# Altium PCB PCB1.PcbDoc (part 1 of 2)
Units mm, origin at the board's own origin, x right, y up, seen from the top; angles counter-clockwise.
Board outline 66.9 x 83.08 mm, 2 copper layers (Top Layer, Bottom Layer); 80 components, 71 nets, 363 pads, 140 vias.
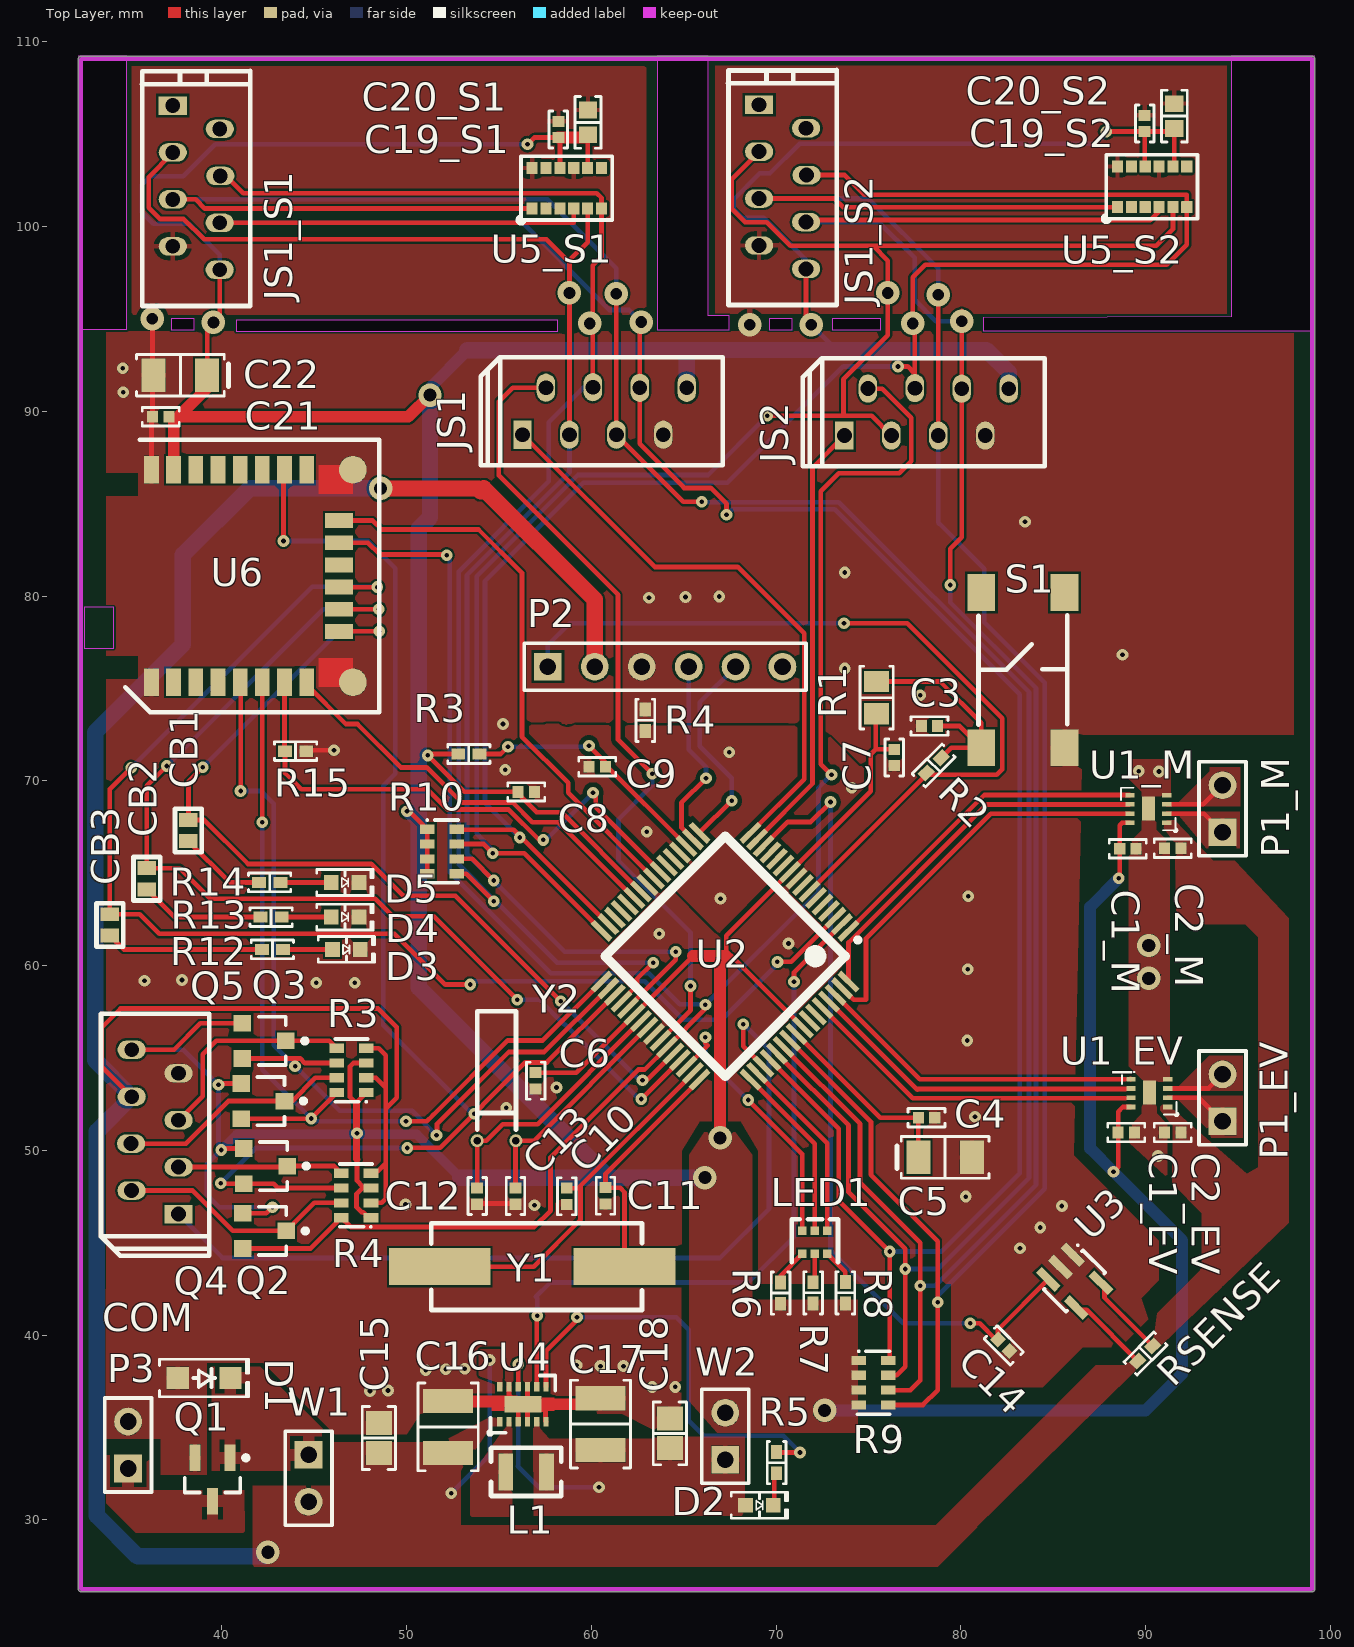
[diagram p0: Top Layer view]
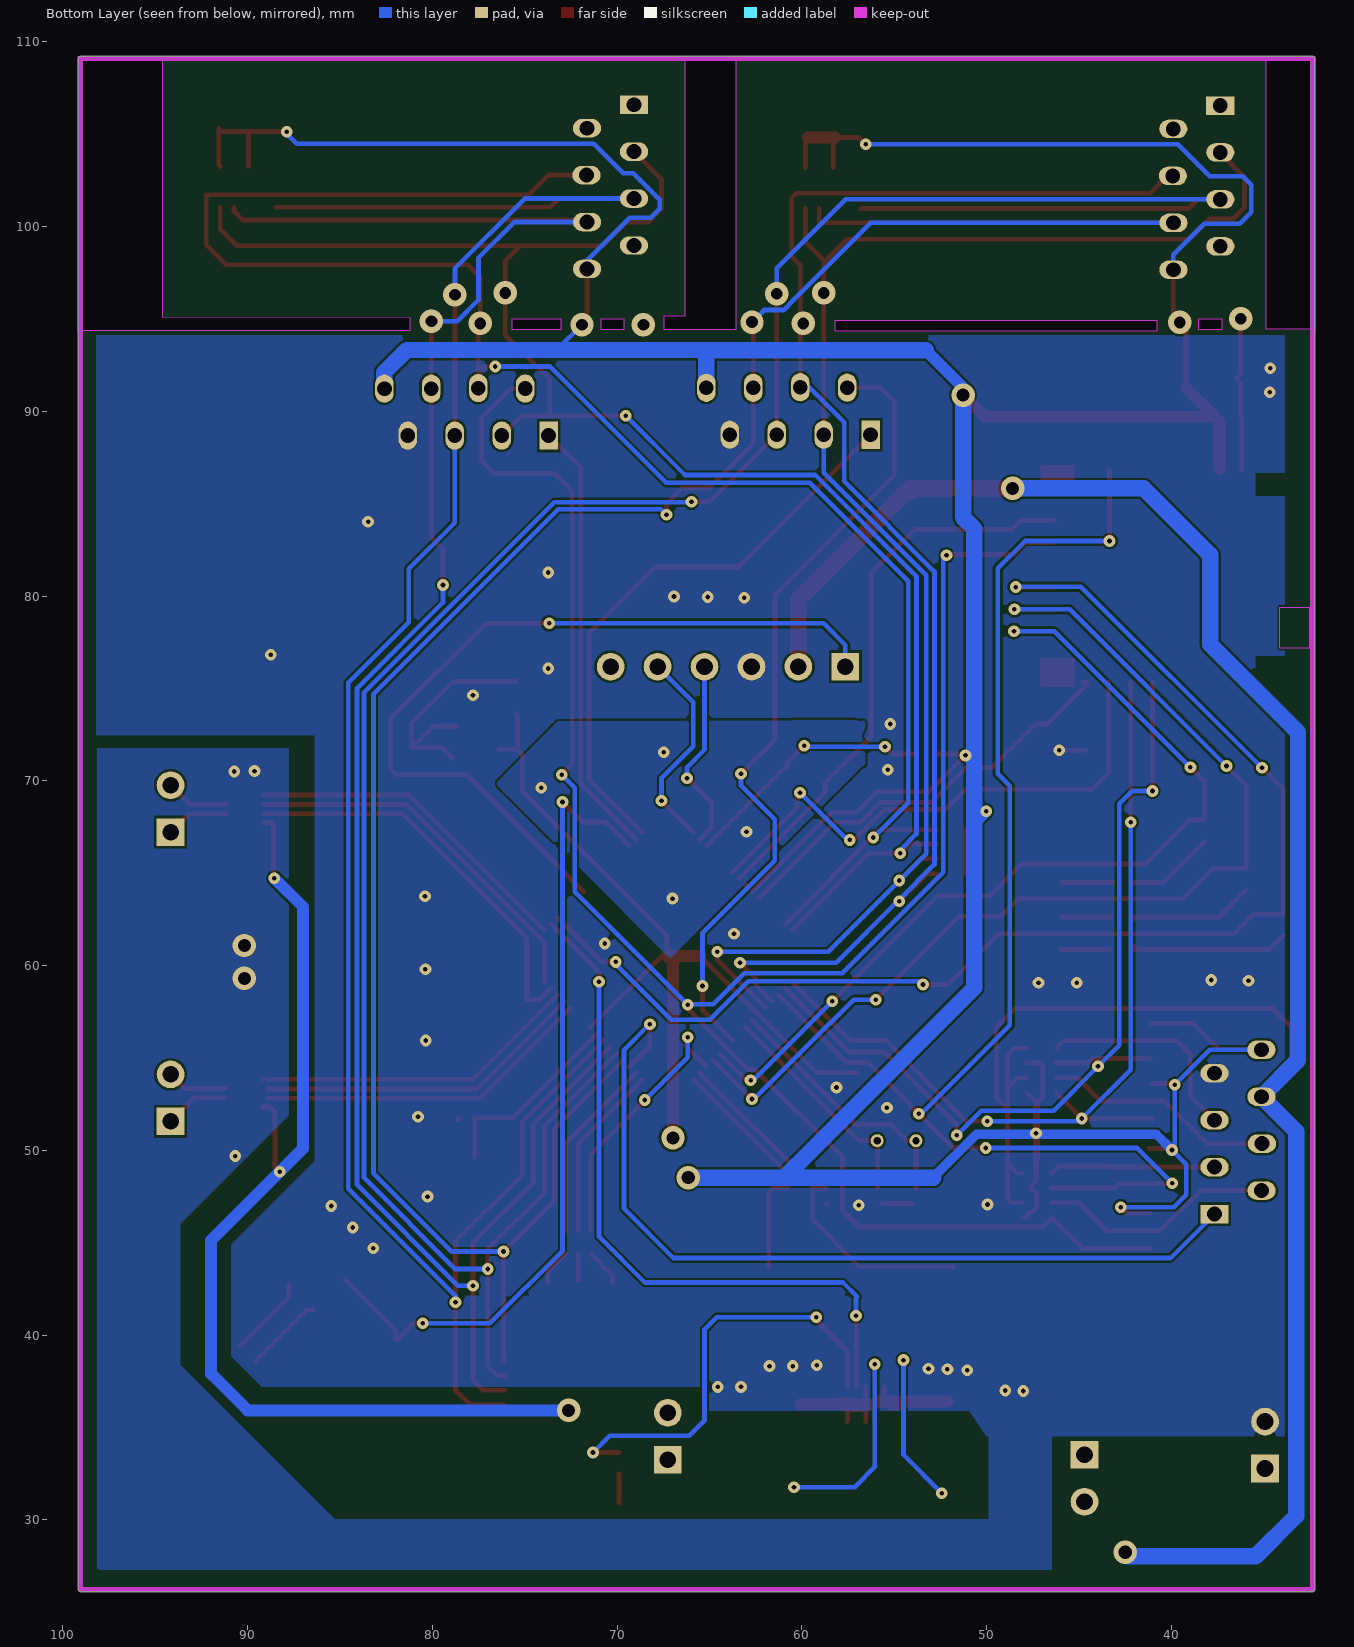
[diagram p1: Bottom Layer view, seen from below]

## Layer stack, top to bottom
Top Solder: solder mask 0.0102, Solder Resist, Dk 3.5
Top Layer: signal copper 0.0356
Dielectric 1: dielectric 0.32, FR-4, Dk 4.8
Bottom Layer: signal copper 0.0356
Bottom Solder: solder mask 0.0102, Solder Resist, Dk 3.5

## Board outline
32.248,26.25 ccw(c32.375,26.25) 32.375,26.123 99.025,26.123 ccw(c99.025,26.25) 99.152,26.25 99.152,109.075 ccw(c99.025,109.075) 99.025,109.202 32.375,109.202 ccw(c32.375,109.075) 32.248,109.075
cut-out: 81.225,95.048 81.225,94.352 99.15,94.352 99.15,95.1 99.152,109.202 94.625,109.202 94.625,95.1
cut-out: 40.8,94.925 40.8,94.325 58.2,94.325 58.2,94.925
cut-out: 32.248,109.202 32.248,94.425 34.875,94.425 34.875,109.202
cut-out: 63.575,94.4 67.457,94.4 67.457,95.175 66.325,95.175 66.325,109.202 63.575,109.202
cut-out: 73.036,95 73.036,94.4 75.664,94.4 75.664,95
cut-out: 37.281,95 37.281,94.4 38.519,94.4 38.519,95
cut-out: 69.631,95 69.631,94.4 70.869,94.4 70.869,95

## Design rules (kind name [scope] priority, off if disabled: settings)
Clearance Clearance_4 [InNamedPolygon('AGND')] p1: gap=0.254 ignorepadtopadclearanceinfootprint=FALSE except(0: Arc-Hole Track-Hole SMDPad-Hole THPad-Hole Via-Hole Fill-Hole Poly-Hole Region-Hole Text-Hole)
Clearance Clearance_3 [InNamedPolygon('AGND') Or  InNamedPolygon('AGND')] p2: gap=0.254 ignorepadtopadclearanceinfootprint=FALSE except(0: Arc-Hole Track-Hole SMDPad-Hole THPad-Hole Via-Hole Fill-Hole Poly-Hole Region-Hole Text-Hole)
Clearance Clearance_2 [InNamedPolygon('AGND')] p3: gap=0.254 ignorepadtopadclearanceinfootprint=FALSE except(0: Arc-Hole Track-Hole SMDPad-Hole THPad-Hole Via-Hole Fill-Hole Poly-Hole Region-Hole Text-Hole)
Clearance Clearance_1 [InNamedPolygon('AGND')] p4: gap=0.635 ignorepadtopadclearanceinfootprint=FALSE except(0: Arc-Hole Track-Hole SMDPad-Hole THPad-Hole Via-Hole Fill-Hole Poly-Hole Region-Hole Text-Hole)
Clearance [All] p5: gap=0.127 ignorepadtopadclearanceinfootprint=FALSE except(0: Arc-Hole Track-Hole SMDPad-Hole THPad-Hole Via-Hole Fill-Hole Poly-Hole Region-Hole Text-Hole)
PolygonConnect PolygonConnect_15 [All vs IsNamedPolygon('GND_S1')] p1: connectstyle=Relief reliefconductorwidth=0.254 reliefentries=4 polygonreliefangle="90 Angle" airgapwidth=0.254
PolygonConnect PolygonConnect_14 [All vs IsNamedPolygon('GND_S1')] p2: connectstyle=Relief reliefconductorwidth=0.254 reliefentries=4 polygonreliefangle="90 Angle" airgapwidth=0.254
PolygonConnect PolygonConnect_13 [All vs IsNamedPolygon('GND_DIGITAL')] p3: connectstyle=Relief reliefconductorwidth=0.254 reliefentries=4 polygonreliefangle="90 Angle" airgapwidth=0
PolygonConnect PolygonConnect_12 [All vs IsNamedPolygon('GND_DIGITAL')] p4: connectstyle=Relief reliefconductorwidth=0.635 reliefentries=4 polygonreliefangle="90 Angle" airgapwidth=0.254
PolygonConnect PolygonConnect_11 [All vs IsNamedPolygon('AGND') Or  IsNamedPolygon('AGND')] p5: connectstyle=Relief reliefconductorwidth=0.254 reliefentries=4 polygonreliefangle="90 Angle" airgapwidth=0
PolygonConnect PolygonConnect_10 [All vs IsNamedPolygon('AGND')] p6: connectstyle=Relief reliefconductorwidth=0.254 reliefentries=4 polygonreliefangle="90 Angle" airgapwidth=0.254
PolygonConnect PolygonConnect_9 [All vs IsNamedPolygon('AGND') Or  IsNamedPolygon('AGND')] p7: connectstyle=Relief reliefconductorwidth=0.254 reliefentries=4 polygonreliefangle="90 Angle" airgapwidth=0.127
PolygonConnect PolygonConnect_8 [All vs IsNamedPolygon('AGND') Or  IsNamedPolygon('AGND')] p8: connectstyle=Direct reliefconductorwidth=0.254 reliefentries=4 polygonreliefangle="90 Angle" airgapwidth=0.254
PolygonConnect PolygonConnect_7 [All vs IsNamedPolygon('AGND')] p9: connectstyle=Relief reliefconductorwidth=0.254 reliefentries=4 polygonreliefangle="90 Angle" airgapwidth=0.254
PolygonConnect PolygonConnect_6 [All vs IsNamedPolygon('GND_DIGITAL')] p10: connectstyle=Relief reliefconductorwidth=0.254 reliefentries=4 polygonreliefangle="90 Angle" airgapwidth=0.254
PolygonConnect PolygonConnect_5 [All vs IsNamedPolygon('GND_DIGITAL')] p11: connectstyle=Relief reliefconductorwidth=0.635 reliefentries=4 polygonreliefangle="90 Angle" airgapwidth=0.254
PolygonConnect PolygonConnect_4 [All vs IsNamedPolygon('VD')] p12: connectstyle=Relief reliefconductorwidth=0.635 reliefentries=4 polygonreliefangle="90 Angle" airgapwidth=0.254
PolygonConnect PolygonConnect_2 [All vs IsNamedPolygon('VIN')] p13: connectstyle=Relief reliefconductorwidth=0.635 reliefentries=4 polygonreliefangle="90 Angle" airgapwidth=0.254
PolygonConnect PolygonConnect_1 [All vs IsNamedPolygon('GND_DIGITAL')] p14: connectstyle=Relief reliefconductorwidth=0.254 reliefentries=4 polygonreliefangle="90 Angle" airgapwidth=0.254
PolygonConnect [All vs IsNamedPolygon('VIN')] p15: connectstyle=Relief reliefconductorwidth=0.254 reliefentries=4 polygonreliefangle="90 Angle" airgapwidth=0.254
PolygonConnect PolygonConnect_3 [All vs IsNamedPolygon('VD')] p16: connectstyle=Relief reliefconductorwidth=0.254 reliefentries=4 polygonreliefangle="90 Angle" airgapwidth=0.254
RoomDefinition M [InComponentClass('M')] p1: confinementstyle=ConfineIn formatcopy=TRUE lockcomponents=FALSE outline 87.15,64.45 97.3,64.45 97.3,71.65 87.15,71.65
RoomDefinition S1 [InComponentClass('S1')] p2: confinementstyle=ConfineIn formatcopy=TRUE lockcomponents=FALSE outline 62.969,95.23 62.969,108.68 35.125,108.68 35.125,95.23
RoomDefinition S2 [InComponentClass('S2')] p3: confinementstyle=ConfineIn formatcopy=TRUE lockcomponents=FALSE outline 94.382,95.285 94.382,108.685 66.7,108.685 66.7,95.285
RoomDefinition Ctrl [InComponentClass('Ctrl')] p4: confinementstyle=ConfineIn formatcopy=TRUE lockcomponents=FALSE outline 32.725,41.225 86.825,41.225 86.825,94.05 32.725,94.05
RoomDefinition PWRSUP [InComponentClass('PWRSUP')] p5: confinementstyle=ConfineIn formatcopy=TRUE lockcomponents=FALSE outline 32.325,27.025 74.8,27.025 74.8,42.6 32.325,42.6
RoomDefinition RGBLED [InComponentClass('RGBLED')] p6: confinementstyle=ConfineIn formatcopy=TRUE lockcomponents=FALSE outline 69.225,46.7 69.225,40.9 74.75,40.9 74.75,46.7
RoomDefinition ISENSOR [InComponentClass('ISENSOR')] p7: confinementstyle=ConfineIn formatcopy=TRUE lockcomponents=FALSE outline 95.143,46.863 80.725,46.863 80.725,33.9 95.143,33.9
RoomDefinition EV [InComponentClass('EV')] p8: confinementstyle=ConfineIn formatcopy=TRUE lockcomponents=FALSE outline 87.475,55.648 87.475,49.823 95.681,49.823 95.681,55.648
RoomDefinition COMBLE [InComponentClass('COMBLE')] p9: confinementstyle=ConfineIn formatcopy=TRUE lockcomponents=FALSE outline 50.625,58.95 50.625,93.2 26.075,93.2 26.075,58.95
RoutingVias [All] p1: holewidth=0.711 width=1.27 viastyle="Through Hole" minholewidth=0.711 minwidth=1.27 maxholewidth=0.711 maxwidth=1.27
SolderMaskExpansion [All] p1: expansion=0.102
Width [All] p1: maxlimit=0.889 minlimit=0.254 preferedwidth=0.254
30 further rules are at their usual default settings.

## Classes and differential pairs
channel class Sensor: S1 S2
channel class actuatorDriver: EV M
net class LED[0..2]: LED0 LED1 LED2
net class D[0..5]: D0 D1 D2 D3 D4 D5
component class S2: C19_S2 C20_S2 JS1_S2 U5_S2
component class S1: C19_S1 C20_S1 JS1_S1 U5_S1
component class RGBLED: LED1 R6 R7 R8
component class PWRSUP: C15 C16 C17 C18 D1 D2 L1 P3 Q1 R3 R4 R5 U4 W1 W2
component class M: C1_M C2_M P1_M U1_M
component class ISENSOR: C14 RSENSE RSENSE1 U3
component class EV: C1_EV C2_EV P1_EV U1_EV
component class Ctrl: C3 C4 C5 C6 C7 C8 C9 C10 C11 C12 C13 COM JS1 JS2 P2 P? Q2 Q3 Q4 Q5 Q? R1 R2 R3 R4 R9 R10 R? S1 U2 Y1 Y2
component class COMBLE: C21 C22 CB1 CB2 CB3 D3 D4 D5 R12 R13 R14 R15 R16 U6

## Components (designator, comment, footprint, x,y, rotation, side; value= is the part's Value field where it differs from the comment)
C1_EV "0.1u" "CAP 0402/1005" 88.956,50.969 r0 top (schematic designator C1)
C1_M "0.1u" "CAP 0402/1005" 89.04,66.321 r0 top (schematic designator C1)
C2_EV "0.1u" "CAP 0402/1005" 91.466,50.969 r0 top (schematic designator C2)
C2_M "0.1u" "CAP 0402/1005" 91.466,66.346 r0 top (schematic designator C2)
C3 "100n" "CAP 0402/1005" 78.304,72.965 r180 top
C4 "100n" "CAP 0402/1005" 78.15,51.765 r0 top
C5 "10u" "CAP POL 1206/3216 - 1.2MM" 79.15,49.622 r0 top
C6 "100n" "CAP 0402/1005" 56.991,53.765 r90 top
C7 "100n" "CAP 0402/1005" 76.4,71.265 r270 top
C8 "100n" "CAP 0402/1005" 56.482,69.4 r180 top
C9 "100n" "CAP 0402/1005" 60.325,70.765 r180 top
C10 "22pf" "CAP 0402/1005" 58.675,47.515 r270 top
C11 "22pf" "CAP 0402/1005" 60.775,47.54 r270 top
C12 "27pf" "CAP 0402/1005" 53.825,47.525 r270 top
C13 "27pf" "CAP 0402/1005" 55.9,47.525 r270 top
C14 "0.1u" "CAP 0402/1005" 82.325,39.45 r315 top
C15 "10u" "CAP 0805/2012" 48.505,34.435 r90 top
C16 "47u" "CAP 1210/3225 - 2.5MM" 52.255,35.035 r90 top
C17 "47u" "CAP 1210/3225 - 2.5MM" 60.505,35.185 r90 top
C18 "10u" "CAP 0805/2012" 64.255,34.685 r90 top
C19_S1 "100n" "CAP 0402/1005" 58.221,105.25 r270 top (schematic designator C19)
C19_S2 "100n" "CAP 0402/1005" 89.95,105.575 r270 top (schematic designator C19)
C20_S1 "4.7u" "CAP 0603/1608" 59.825,105.629 r270 top (schematic designator C20)
C20_S2 "4.7u" "CAP 0603/1608" 91.554,105.975 r270 top (schematic designator C20)
C21 "100n" "CAP 0402/1005" 36.7,89.702 r180 top
C22 "4.7u" "CAP POL 1206/3216 - 1.2MM" 37.765,91.95 r180 top
CB1 "Circuit Breaker" "JUMPER PAD" 38.2,67.308 r90 top
CB2 "Circuit Breaker" "JUMPER PAD" 35.95,64.7 r90 top
CB3 "Circuit Breaker" "JUMPER PAD" 33.95,62.2 r90 top
COM "Header 8" 7-215460-8 36.4,51 r270 top
D1 "9.1 V" SOD123F 39.055,37.685 r0 top
D2 "LED2" "LED 0603/1608 BLUE" 69.105,30.794 r0 top
D3 "awake" "LED 0603/1608 BLUE" 46.75,60.875 r0 top
D4 "Tx/Rx" "LED 0603/1608 BLUE" 46.675,62.625 r0 top
D5 "connected" "LED 0603/1608 BLUE" 46.675,64.5 r0 top
JS1 "Header 8" 7-215460-8 60.725,90 r180 top
JS1_S1 "Header 8" 7-215464-8 38.625,102.1 r90 top (schematic designator JS1)
JS1_S2 "Header 8" 7-215464-8 70.355,102.145 r90 top (schematic designator JS1)
JS2 "Header 8" 7-215460-8 78.15,89.95 r180 top
L1 "Inductor" "IND 1008 [2520 Metric]" 56.475,32.6 r0 top
LED1 "LED_Red_Blue_Green" SMLP36 72.102,45.025 r0 top
P1_EV "Actuator" HDR1X2 94.165,51.573 r90 top (schematic designator P1)
P1_M "Actuator" HDR1X2 94.165,67.221 r90 top (schematic designator P1)
P2 "Header 6" HDR1X6 57.65,76.175 r0 top
P3 "BAT" HDR1X2 34.935,32.785 r90 top
Q1 "FDN5618P" SOT-23_M 39.505,32.185 r270 top
Q2 "MOSFET-N" SOT-23 42.225,52.668 r270 top
Q3 "MOSFET-N" SOT-23 42.375,49.15 r270 top
Q4 "MOSFET-N" SOT-23 42.325,45.643 r270 top
Q5 "MOSFET-N" SOT-23 42.3,55.925 r270 top
R1 "10k" "RES 0805/2012" 75.45,74.5 r270 top
R2 "330" "RES 0402/1005" 78.534,70.831 r45 top
R3 "10k" EXB38V 47.025,54.325 r90 top
R3 "0" "RES 0402/1005" 53.375,71.45 r0 top
R4 "10k" EXB38V 47.275,47.559 r90 top
R4 "0" "RES 0402/1005" 62.925,73.276 r270 top
R5 "22" "RES 0402/1005" 70.03,33.098 r270 top
R6 "47" "RES 0402/1005" 70.25,42.275 r270 top
R7 "22" "RES 0402/1005" 72.009,42.291 r270 top
R8 "220" "RES 0402/1005" 73.75,42.294 r270 top
R9 "47K" EXB38V 75.275,37.425 r270 top
R10 "4.7k" EXB38V 51.925,66.175 r270 top
R12 "220" "RES 0402/1005" 42.75,60.875 r180 top
R13 "220" "RES 0402/1005" 42.675,62.625 r180 top
R14 "22" "RES 0402/1005" 42.6,64.5 r180 top
R15 "10k" "RES 0402/1005" 44.002,71.6 r0 top
RSENSE "0.4" "RES 0402/1005" 89.993,39.007 r225 top
S1 "SW-PB" Button 83.361,75.99 r90 top
U1_EV "DRV8838" S-PWSON-N8 90.206,53.098 r180 top (schematic designator U1)
U1_M "DRV8838" S-PWSON-N8 90.15,68.475 r180 top (schematic designator U1)
U2 "PIC32MX340F512H-80I/PT_1" TSQFP50P1200X1200X120-64N 67.25,60.506 r225 top
U3 "TS1100" SOT23-5 86.157,42.926 r225 top
U4 "TPS627451" R-PWSON-N12 56.3,36.262 r0 top
U5_S1 "VL6180x" LGA12 58.68,102.07 r90 top (schematic designator U5)
U5_S2 "VL6180x" LGA12 90.355,102.145 r90 top (schematic designator U5)
U6 "RN4020" RN4020 37.35,81.083 r90 top
W1 "Shunt, Jumper" HDR1X2 44.705,33.525 r270 top
W2 "Shunt, Jumper" HDR1X2 67.255,33.26 r90 top
Y1 "8MHz" XTAL_HC-49/SM 57.05,43.709 r180 top
Y2 "XTAL" XTAL_AB26T 54.875,50.525 r0 top

## Footprints (in the part's own frame and the unit in brackets; to place one, negate y for a bottom-side part, rotate by r counter-clockwise, add the part's x,y. Pads: shape width x height; smd on the part's side, far side on the other; paste and mask are expansions set on the pad)
7-215460-8 [mm] "Connecteur carte-à-carte, Entrée latérale, 1.27 mm, 8 Contact(s), Embase, Série Micro-MaTch"
  oval 1x1.524 hole 0.8: 1(-4.445,-1.27) 2(-3.175,1.27) 3(-1.905,-1.27) 4(-0.635,1.27) 5(0.635,-1.3) 6(1.905,1.27) 7(3.175,-1.275)
  rect 1x1.524 hole 0.8: 8(4.445,1.27)
  silkscreen extent -6.4,-2.93 6.7,2.93
7-215464-8 [mm] "Connecteur carte-à-carte, 1.27 mm, 8 Contact(s), Mâle, Série Micro-MaTch, Traversant, 2 Rangée(s)"
  oval 1x1.524 hole 0.8: 1(-4.445,-1.27) 2(-3.175,1.27) 3(-1.905,-1.27) 4(-0.635,1.27) 5(0.635,-1.3) 6(1.905,1.27) 7(3.175,-1.275)
  rect 1x1.524 hole 0.8: 8(4.445,1.27)
  silkscreen extent -6.4,-2.93 6.33,2.95
Button [mm]
  rect 2x1.5 smd: 1(-4.2,2.25) 2(-4.2,-2.25) 3(4.2,-2.25) 4(4.2,2.25)
  silkscreen extent -2.95,-2.4 2.98,2.4, body extent -3.75,-2.25 3.75,2.25, height 3.8
"CAP 0402/1005" [mm] "Chip Capacitor, 2-Leads, Body 1.02x0.51mm, IPC Medium Density"
  rect 0.6x0.64 smd: 1(-0.44,0) 2(0.44,0)
  silkscreen extent -1,-0.5 1,0.5, body extent -0.5,-0.26 0.5,0.26, height 0.52
"CAP 0603/1608" [mm] "Chip Capacitor, 2-Leads, Body 1.60x0.80mm, IPC Medium Density"
  rect 0.9x1 smd: 1(-0.675,0) 2(0.675,0)
  silkscreen extent -1.4,-0.7 1.4,0.7, body extent -0.8,-0.41 0.8,0.41, height 0.82
"CAP 0805/2012" [mm] "Chip Capacitor, 2-Leads, Body 2.00x1.20mm, IPC Medium Density"
  rect 1.3x1.4 smd: 1(-0.8,0) 2(0.8,0)
  silkscreen extent -1.7,-0.9 1.7,0.9, body extent -1,-0.64 1,0.64, height 1.26
"CAP 1210/3225 - 2.5MM" [mm] "Chip Capacitor, 2-Leads, Body 3.20x2.50mm, IPC Medium Density"
  rect 1.3x2.7 smd: 1(-1.4,0) 2(1.4,0)
  silkscreen extent -2.37,-1.63 2.37,1.63, body extent -1.6,-1.25 1.6,1.25, height 2.5
"CAP POL 1206/3216 - 1.2MM" [mm] "Chip Capacitor, 2-Leads, Body 3.25x1.60mm, IPC Medium Density"
  rect 1.3x1.8 smd: 1(-1.45,0) 2(1.45,0)
  silkscreen extent -2.6,-1.12 2.37,1.12, body extent -1.6,-0.8 1.6,0.8, height 1.2
EXB38V [mm] "Chip Resistor Array, (0603x4); SM; 8 Leads; Body 3.40 x 1.75 mm (LxW max)"
  rect 0.5x0.8 smd: 1(-1.2,-0.8) 2(-0.4,-0.8) 3(0.4,-0.8) 4(1.2,-0.8) 5(1.2,0.8) 6(0.4,0.8) 7(-0.4,0.8) 8(-1.2,0.8)
  silkscreen extent -1.75,-0.87 1.7,0.87
HDR1X2 [mm] "Connector; Header; 2 Position"
  rect 1.5x1.5 hole 0.9: 1(0,0)
  round 1.5 hole 0.9: 2(2.54,0)
  silkscreen extent -1.27,-1.27 3.81,1.27
HDR1X6 [mm] "Connector; Header; 6 Position"
  rect 1.5x1.5 hole 0.9: 1(0,0)
  round 1.5 hole 0.9: 2(2.54,0) 3(5.08,0) 4(7.62,0) 5(10.16,0) 6(12.7,0)
  silkscreen extent -1.27,-1.27 13.97,1.27
"IND 1008 [2520 Metric]" [mm]
  rect 0.8x2 smd: 1(-1.1,0) 2(1.1,0)
  silkscreen extent -1.9,-1.3 1.9,1.3, body extent -1.05,-0.9 0.95,0.87, height 2.3
"JUMPER PAD" [mm]
  rect 0.75x1 smd: 1(0.575,0) 2(-0.575,0)
  silkscreen extent -1.18,-0.72 1.17,0.72
"LED 0603/1608 BLUE" [mm] "Chip Diode, 2-Leads, Body 1.60x0.80mm, IPC Medium Density"
  rect 0.8x0.8 smd: 1(-0.75,0) 2(0.75,0)
  silkscreen extent -1.52,-0.7 1.52,0.7, body extent -0.8,-0.4 0.8,0.4, height 0.53
LGA12 [mm] "optical IR sensor"
  rrect5% 0.65x0.6 smd: 1(-1.1,1.875) 2(-1.1,1.125) 3(-1.1,0.375) 4(-1.1,-0.375) 5(-1.1,-1.125) 6(-1.1,-1.875) 7(1.1,-1.875) 8(1.1,-1.125) 9(1.1,-0.375) 10(1.1,0.375) 11(1.1,1.125) 12(1.1,1.875)
  silkscreen extent -1.92,-2.45 1.73,2.68, body extent -1.43,-2.2 1.41,2.18, height 1
R-PWSON-N12 [mm]
  rect 0.28x0.5 smd: 1(-1.25,-0.95) 2(-0.75,-0.95) 3(-0.25,-0.95) 4(0.25,-0.95) 5(0.75,-0.95) 6(1.25,-0.95) 7(1.25,0.95) 8(0.75,0.95) 9(0.25,0.95) 10(-0.25,0.95) 11(-0.75,0.95) 12(-1.25,0.95)
  rect 2x0.9 smd: 3(0,0)
  Top Layer region: 1,0.125 1.7,0.125 1.7,0.375 1,0.375
  Top Layer region: 1,-0.375 1.7,-0.375 1.7,-0.125 1,-0.125
  Top Layer region: -1.7,-0.375 -1,-0.375 -1,-0.125 -1.7,-0.125
  Top Layer region: -1.7,0.125 -1,0.125 -1,0.375 -1.7,0.375
  silkscreen extent -1.88,-1.65 1.75,1.55, body extent -1.55,-1.05 1.55,1.05, height 0.8
"RES 0402/1005" [mm] "Chip Resistor, 2-Leads, Body 1.0x0.5mm, IPC Medium Density"
  rect 0.75x0.6 smd: 1(-0.575,0) 2(0.575,0)
  silkscreen extent -1.14,-0.51 1.14,0.51, body extent -0.5,-0.25 0.5,0.25, height 0.35
"RES 0805/2012" [mm] "Chip Resistor, 2-Leads, Body 2.00x1.25mm, IPC Medium Density"
  rect 1.15x1.35 smd: 1(-0.875,0) 2(0.875,0)
  silkscreen extent -1.7,-0.9 1.7,0.9, body extent -0.95,-0.62 1.05,0.63, height 0.6
RN4020 [mm] "Bluetooth® Low Energy Module"
  rrect100% 1x2 on Keep-Out: 0(-4.95,3) 0(4.95,3)
  rect 1.5x0.8 smd: 1(-5.75,1.15) 2(-5.75,-0.05) 3(-5.75,-1.25) 4(-5.75,-2.45) 5(-5.75,-3.65) 6(-5.75,-4.85) 7(-5.75,-6.05) 8(-5.75,-7.25) 17(5.75,-7.25) 18(5.75,-6.05) 19(5.75,-4.85) 20(5.75,-3.65) 21(5.75,-2.45) 22(5.75,-1.25) 23(5.75,-0.05) 24(5.75,1.15)
  round 1.5 smd: 9(-5.75,-9.75) 16(5.75,-9.75)
  rect 0.8x1.5 smd: 10(-3,-9) 11(-1.8,-9) 12(-0.6,-9) 13(0.6,-9) 14(1.8,-9) 15(3,-9)
  Top Layer region: 6,-7.9 4.45,-7.9 4.45,-9.75 6,-9.75
  Top Layer region: -6,-9.75 -4.45,-9.75 -4.45,-7.9 -6,-7.9
  Keep-Out Layer region: -3.9,3.2 -1.7,3.2 -1.7,4.8 -3.9,4.8
  silkscreen extent -7.37,-11.17 7.37,2.58, body extent -5.75,-9.75 5.75,9.75, height 2.3
S-PWSON-N8 [mm]
  rrect1% 0.5x0.25 smd: 1(-1,0.75) 2(-1,0.25) 3(-1,-0.25) 4(-1,-0.75) 5(1,-0.75) 6(1,-0.25) 7(1,0.25) 8(1,0.75)
  rect 0.7x1.3 smd: 4(0,-0.025)
  silkscreen extent -1.57,-1.15 1.48,1.25, body extent -1.01,-1 1.01,0.95, height 0.8
SMLP36 [mm] "PICOLED - RGB"
  rect 0.45x0.45 smd: 1(-0.675,-0.625) 2(0,-0.625) 3(0.675,-0.625) 4(0.675,0.625) 5(0,0.625) 6(-0.675,0.625)
  silkscreen extent -1.25,-1.07 1.25,1.25, body extent -0.91,-0.75 0.84,0.74, height 0.2
SOD123F [mm] "SODFL, 2-Leads, Body 1.60x3.50mm, IPC Medium Density"
  rect 1.2x1.2 smd: 1(-1.43,0) 2(1.43,0)
  silkscreen extent -2.41,-1.02 2.41,1.02, body extent -1.75,-0.8 1.75,0.8, height 1.1
SOT23-5 [mm] "SOT-23/SC-74A; 5 Leads; Body 3.1 x 3 mm, inc. leads (LxW max)"
  rect 0.45x1.45 smd: 1(-0.95,-1.075) 2(0,-1.075) 3(0.95,-1.075) 4(0.95,1.075) 5(-0.95,1.075)
  silkscreen extent -1.55,-1.3 1.5,0.85, body extent -1.6,-0.88 1.6,0.88, height 1.3
SOT-23 [mm] "SOT-23; 3 Leads; Body 3.0 x 2.5 mm, inc. leads (LxW max), Alternate Lead Configuration"
  rect 0.9x0.95 smd: 1(0,1.175) 2(-0.95,-1.175) 3(0.95,-1.175)
  silkscreen extent -1.3,-0.3 1.3,2.33
SOT-23_M [mm] "SOT23, 3-Leads, Body 2.9x1.3mm, Pitch 0.95mm, Lead Span 2.5mm, IPC Low Density"
  rect 1.45x0.6 smd: 1(-1.175,0.95) 2(-1.175,-0.95) 3(1.175,0)
  silkscreen extent -1.3,-1.5 0.7,1.93, body extent -0.7,-1.5 0.7,1.5, height 1.1
TSQFP50P1200X1200X120-64N [mm] "TSQFP, 64-Leads, Body 10.00x10.00mm, Pitch 0.50mm, IPC Medium Density"
  rect 1.4x0.3 smd: 1(-5.7,3.75) 2(-5.7,3.25) 3(-5.7,2.75) 4(-5.7,2.25) 5(-5.7,1.75) 6(-5.7,1.25) 7(-5.7,0.75) 8(-5.7,0.25) 9(-5.7,-0.25) 10(-5.7,-0.75) 11(-5.7,-1.25) 12(-5.7,-1.75) 13(-5.7,-2.25) 14(-5.7,-2.75) 15(-5.7,-3.25) 16(-5.7,-3.75) 33(5.7,-3.75) 34(5.7,-3.25) 35(5.7,-2.75) 36(5.7,-2.25) 37(5.7,-1.75) 38(5.7,-1.25) 39(5.7,-0.75) 40(5.7,-0.25) 41(5.7,0.25) 42(5.7,0.75) 43(5.7,1.25) 44(5.7,1.75) 45(5.7,2.25) 46(5.7,2.75) 47(5.7,3.25) 48(5.7,3.75)
  rect 0.3x1.4 smd: 17(-3.75,-5.7) 18(-3.25,-5.7) 19(-2.75,-5.7) 20(-2.25,-5.7) 21(-1.75,-5.7) 22(-1.25,-5.7) 23(-0.75,-5.7) 24(-0.25,-5.7) 25(0.25,-5.7) 26(0.75,-5.7) 27(1.25,-5.7) 28(1.75,-5.7) 29(2.25,-5.7) 30(2.75,-5.7) 31(3.25,-5.7) 32(3.75,-5.7) 49(3.75,5.7) 50(3.25,5.7) 51(2.75,5.7) 52(2.25,5.7) 53(1.75,5.7) 54(1.25,5.7) 55(0.75,5.7) 56(0.25,5.7) 57(-0.25,5.7) 58(-0.75,5.7) 59(-1.25,5.7) 60(-1.75,5.7) 61(-2.25,5.7) 62(-2.75,5.7) 63(-3.25,5.7) 64(-3.75,5.7)
  silkscreen extent -5.82,-4.6 4.6,4.6, body extent -5,-5 5,5, height 1.2
XTAL_AB26T [mm] "ABRACON  AB26T-32.768KHZ.  CRYSTAL, 32.768KHZ, 12.5PF, CYLINDER"
  round 0.7 hole 0.4: 1(-1.05,0) 2(1.05,0)
  silkscreen extent -1.05,0.6 1.05,7
XTAL_HC-49/SM [mm] "MULTICOMP   HC49SM-8-30-50-60-16-ATF  Cristal, 8 MHz, CMS, 11.4mm x 4.65mm, 50 ppm, 16 pF, 30 ppm, Série HC49SM"
  rect 5.5x2 smd: 1(-4.75,0) 2(5.25,0)
  silkscreen extent -5.7,-2.35 5.7,2.35

## Part data
C1_EV C1_M C2_EV C2_M: library part Cap, "KEMET  C0402C104M4RACTU  CAP, MLCC, X7R, 0.1UF, 16V, 0402"
C3 C4 C6 C7 C8 C9 C19_S1 C19_S2 C20_S1 C20_S2 C21: library part Cap, "Condensateur céramique multicouche CMS, 0402 [1005 Metric], 0.1 µF, 10 V, ± 10%"
C5: library part "Cap Pol2", "Condensateur tantale CMS, TANTAMOUNT®, 10 µF, 6.3 V, Série 293D, ± 10%"
C10 C11: library part Cap, "Condensateur céramique multicouche CMS, 0402 [1005 Metric], 22 pF, 50 V, ± 5%"
C12 C13: library part Cap, "Condensateur céramique multicouche CMS, 0402 [1005 Metric], 27 pF, 50 V, ± 5%"
C14: library part Cap, "KEMET  C0402C104K8PACTU  Condensateur céramique multicouche CMS, 0402 [1005 Metric], 0.1 µF, 10 V, ± 10%, X5R, Série C"
C15 C18: library part Cap, "Condensateur céramique multicouche CMS, 0805 [2012 Metric], 10 µF, 10 V, ± 10%, X5R, Série C"
C16 C17: library part Cap, "Condensateur céramique multicouche CMS, 1210 [3225 Metric], 47 µF, 16 V, ± 20%, X5R, Série GRM"
C22: library part "Cap Pol2", "Condensateur tantale CMS, 4.7 µF, 10 V, Série T491, ± 10%"
COM JS1 JS1_S1 JS1_S2 JS2: "Header, 8-Pin"
D1: library part "D Zener", "Diode simple Zener, 9.1 V, 375 mW, SOD-123F, 2 %"
D2: "LED, Bleu, CMS, 0.8mm x 1.6mm, 5 mA, 2.9 V, 470 nm"
D3 D4: library part LED2, "LED, Ambre, CMS, 0.8mm x 1.1mm, 5 mA, 1.95 V, 590 nm"
D5: library part LED2, "LED, Bleu, CMS, 0.8mm x 1.6mm, 5 mA, 2.9 V, 470 nm"
L1: "Inductance haute fréquence CMS, DFE252010P Series, 4.7 µH, 1.3 A, 1008 [2520 Metric], Blindé"
LED1: "PICOLED, Rouge, Vert, Bleu, CMS, Rectangulaire, R 5mA, G 5mA, B 5mA"
P1_EV P1_M P3: library part "Header 2", "Header, 2-Pin"
P2: "Header, 6-Pin"
Q1: library part MOSFET-P, "Transistor MOSFET, Canal P, -1.25 A, -60 V, 170 mohm, -10 V, 20 V"
Q2 Q3 Q4 Q5: "Transistor MOSFET, Canal N, 200 mA, 60 V, 2.7 ohm, 10 V, 1.2 V"
R1 R15: library part Res2, "Résistance à puce CMS, Couche épaisse, 10 kohm, 150 V, 0805"
R2: library part Res2, "Résistance à puce CMS, Couche mince, 330 ohm, 25 V, 0402"
R3 R4 R9: library part ResistorArray
R3 R4: library part Res2, "Résistance à puce CMS, Couche épaisse, 0 ohm, 50 V"
R5 R7 R14: library part Res2, "ésistance à puce CMS, Couche épaisse, 22 ohm, 50 V, 0402 [1005 Metric], 63 mW, ± 1%"
R6: library part Res2, "Résistance à puce CMS, Couche épaisse, 47 ohm, 50 V, 0402 [1005 Metric], 63 mW, ± 1%"
R8 R12 R13: library part Res2, "Résistance à puce CMS, Couche épaisse, 220 ohm, 50 V, 0402 [1005 Metric], 63 mW, ± 1%, Série RC"
R10: library part ResistorArray, "Réseau de résistance fixe, 4.7 kohm, 50 V, 4 Element(s), Isolé, 0402 [1005 Metric], 63 mW"
RSENSE: library part Res2, "Résistance CMS de détection de courant, 0.33 ohm, 63 mW, 0402 [1005 Metric], ± 1%, Série LRCS"
S1: "Commutateur tactile, Non lumineux, 12 V, 50 mA, 100 gf, CMS, Série DTSZML-6"
U1_EV U1_M: "Moteur Driver [H - bridge]"
U2: "High Performance 80 MHz MIPS-Based 32-Bit Flash Microcontroller, 512KB Program Memory, 64-pin TQFP"
U3: "Current Sense Amplifier, Precision, 1"
U4: "DC/DC CONV, SYNC BUCK, 2.5MHZ"
U5_S1 U5_S2: "IR proximity sensor"
U6: "RN4020 Bluetooth® Low Energy Module"
W1 W2: library part Jumper, "Jumper Socket, Pin Headers, 2 Voies, 1.27 mm"
Y1: library part XTAL, "Crystal Oscillator"
Y2: "Crystal Oscillator"

## Via types
v1: diameter 0.635, hole 0.254, Top Layer to Bottom Layer, 112 vias
v2: diameter 1.27, hole 0.635, Top Layer to Bottom Layer, 12 vias
v3: diameter 0.635, hole 0.254, Top Layer to Bottom Layer, tented top, 8 vias
v4: diameter 1.27, hole 0.711, Top Layer to Bottom Layer, 8 vias

## Nets (pads, with @x,y where several pads share a name; then routed paths per layer and width w, separated by ;. In a path a pad name is that pad's centre, name@x,y a point inside that pad or via, vN(x,y) a via of type N, cw(c..) or ccw(c..) an arc to the next point about the centre after c; other vN are vias at no path point)
A0_M: U1_M.5 U2.1 | length 18.3
  Top Layer w0.254: U2.1@73.923,61.885 81.269,69.231 U1_M.5@89.15,69.231
A1_M: U1_M.6 U2.64 | length 20.4
  Top Layer w0.254: U2.64@73.923,59.127 73.923,61.248 81.398,68.723 U1_M.6@89.15,68.723
A2_M: U1_M.7 U2.63 | length 22
  Top Layer w0.254: U2.63@73.57,58.774 73.581,58.774 74.21,58.145 74.875,58.145 74.875,61.475 81.625,68.225 U1_M.7@89.15,68.225
AGND: C9.2 R4.2@62.925,72.701 U2.20
  other v1: 67,63.625 63,67.25 74.1,69.625 67.475,71.55
AN1: JS1.8 U2.16 | length 31.7
  Top Layer w0.254: JS1.8@56.28,88.73 63.435,81.575 67.925,81.575 71.525,77.975 71.525,70.093 U2.16@68.62,67.188
AN2: JS2.8 U2.15 | length 23.8
  Top Layer w0.254: U2.15@68.974,66.835 71.975,69.836 71.975,86.95 JS2.8@73.705,88.68
AVCC: C9.1 R3.2@53.95,71.45 U2.19 | length 13.8
  Top Layer w0.254: R3.2@53.95,71.45 55.1,71.45 v1(55.5,71.85) ; v1(59.875,71.9) 60.765,71.01 C9.1@60.765,70.872 ; C9.1@60.765,70.765 C9.1@60.765,70.872 ; U2.19@65.155,66.481 C9.1@60.765,70.872
  Bottom Layer w0.254: v1(55.5,71.85) 59.825,71.85 v1(59.875,71.9)
B0: U1_EV.5 U2.62 | length 17.6
  Top Layer w0.254: U2.62@73.216,58.42 77.787,53.85 88.906,53.85 ; U1_EV.5@89.181,53.873 U1_EV.5@89.2,53.854
B1: U1_EV.6 U2.61 | length 18
  Top Layer w0.254: U2.61@72.863,58.067 77.654,53.275 ; 77.704,53.325 88.931,53.325
B2: U1_EV.7 U2.60 | length 18.4
  Top Layer w0.254: U2.60@72.509,57.713 77.397,52.825 88.931,52.825
CTS: COM.7 Q4.1 R4.7 | length 12.9
  Top Layer w0.254: COM.7@35.125,47.825 38.425,47.825 40.607,45.643 Q4.1@43.5,45.643 45.016,47.159 R4.7@46.475,47.159
D0: R15.1 U2.23 U6.7 | length 29.9
  Top Layer w0.254: R15.1@43.4,71.627 U6.7@43.4,75.333 ; R15.1@43.427,71.6 43.427,70.423 44.3,69.55 51.125,69.55 52.23,68.445 55.53,68.445 57.173,66.802 v1(57.404,66.802) ; v1(60.1,69.35) 60.25,69.2 60.25,68.558 U2.23@63.741,65.067
  Bottom Layer w0.254: v1(57.404,66.802) 57.552,66.802 v1(60.1,69.35)
D1: U2.24 U6.15 | length 30.6
  Top Layer w0.254: U6.15@46.35,84.083 48.167,84.083 48.65,83.6 53.9,83.6 56.25,81.25 56.25,72.392 58.749,69.893 58.749,69.352 U2.24@63.387,64.714
D2: U2.27 U6.8 | length 22.9
  Top Layer w0.254: U6.8@44.869,75.333 U6.8@44.6,75.333 44.6,75.194 46.719,73.075 47.35,73.075 49.7,70.725 51.1,70.725 52.999,68.826 55.749,68.826 56.81,67.765 58.215,67.765 U2.27@62.327,63.653
D3: CB1.1 U2.44 U6.10 | length 50.6
  Top Layer w0.254: v1(38.975,70.727) 38.2,69.952 CB1.1@38.2,67.883 39.042,67.883 41.425,65.5 48.1,65.5 49.825,63.775 52.65,63.775 v1(58.35,58.075) ; U6.10@46.35,78.083 46.367,78.1 v1(48.525,78.1) ; v1(62.775,53.8) 63.01,53.8 U2.44@64.448,55.238
  Bottom Layer w0.254: v1(38.975,70.727) 46.348,78.1 v1(48.525,78.1) ; v1(58.35,58.075) 62.625,53.8 v1(62.775,53.8)
D4: CB2.1 U2.45 U6.11 | length 58
  Top Layer w0.254: v1(37.025,70.802) 35.95,69.727 CB2.1@35.95,65.275 37.725,65.275 39.375,63.625 48.3,63.625 49.25,62.675 51.475,62.675 v1(56,58.15) ; U6.11@46.35,79.283 v1(48.5,79.283) ; v1(62.7,52.775) U2.45@64.81,54.885
  Bottom Layer w0.254: v1(37.025,70.802) 45.5,79.277 v1@48.5,79.277 ; v1(56,58.15) 57.2,58.15 58.525,56.825 ; 58.557,56.825 62.607,52.775 v1(62.7,52.775)
D5: CB3.1 U2.3 U6.12 | length 72
  Top Layer w0.254: v1(35.1,70.702) 33.95,69.552 CB3.1@33.95,62.775 35.575,62.775 36.625,61.725 49.35,61.725 52.1,58.975 v1(53.45,58.975) ; U6.12@46.35,80.483 v1(48.425,80.483) ; v1(70.075,60.2) 70.824,60.2 U2.3@73.216,62.592
  Bottom Layer w0.254: v1(35.1,70.702) 44.9,80.502 v1@48.425,80.502 ; v1(53.45,58.975) 53.625,59.15 62.9,59.15 64.975,57.075 67.075,57.075 70.075,60.075 v1(70.075,60.2)